# Altium PCB PCB1.PcbDoc (part 3 of 4)
Units mm, origin at the board's own origin, x right, y up, seen from the top; angles counter-clockwise.
Board outline 27.87 x 27.34 mm, 4 copper layers (Top Layer, Mid-Layer 1, Mid-Layer 2, Bottom Layer); 8 components, 11 nets, 32 pads, 618 vias.
Unrouted connection lines stored in the file: 1.
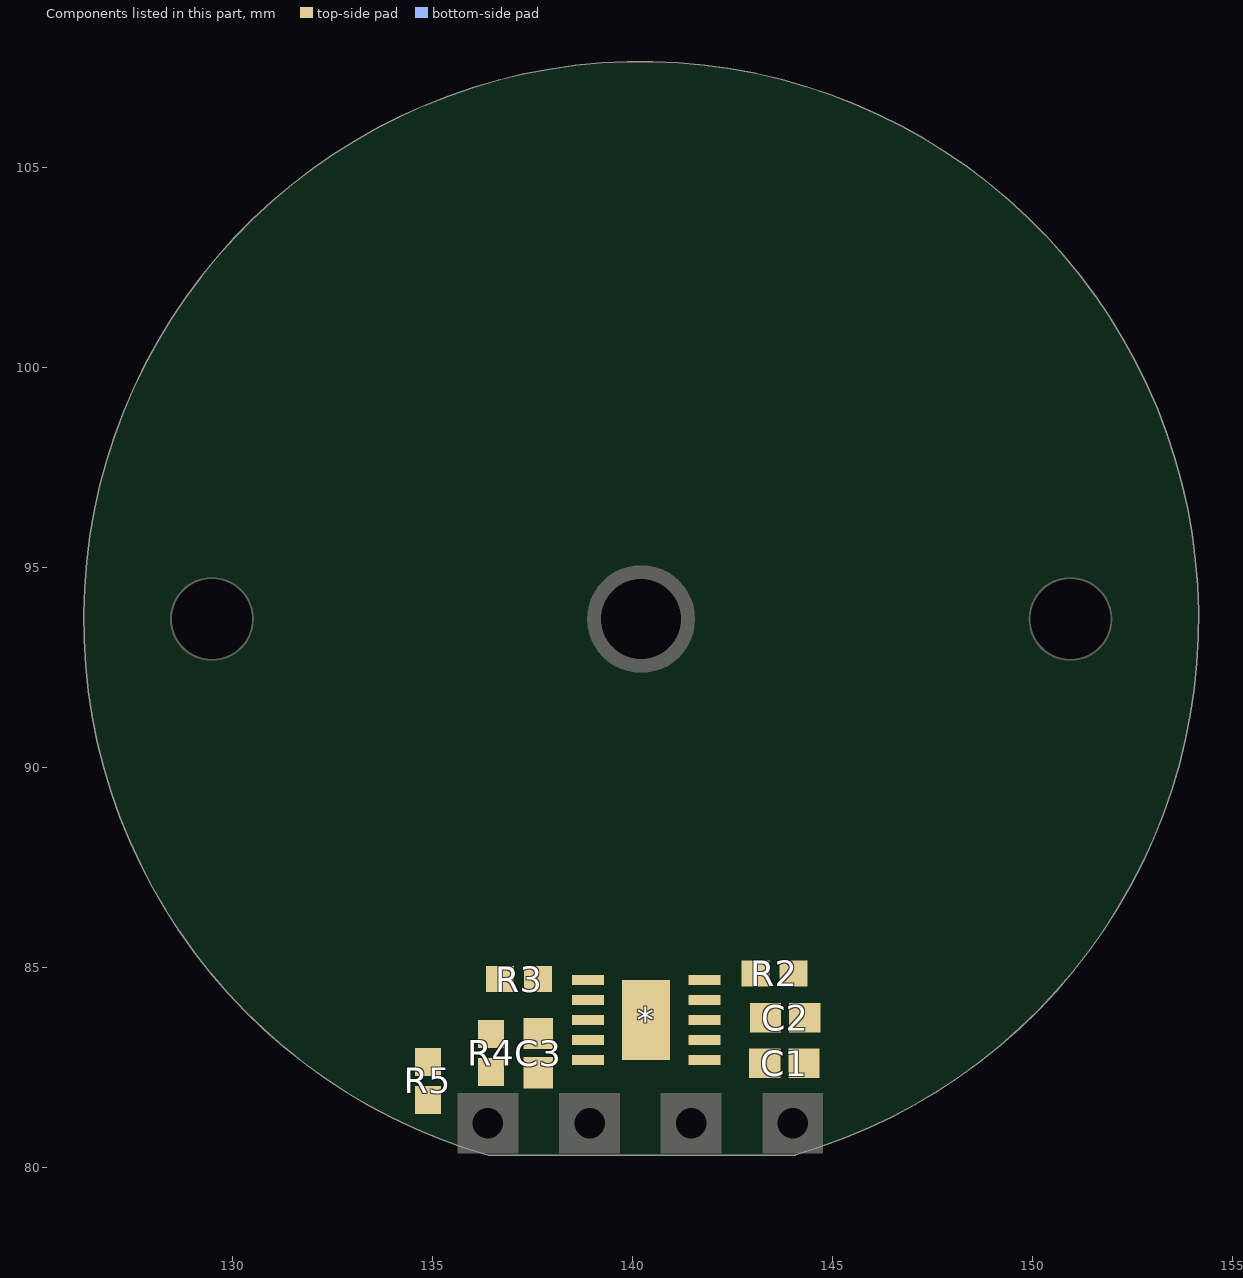
[diagram p5: the components of this part, seen from the top]

## Via types
v1: diameter 0.35, hole 0.3, Top Layer to Bottom Layer, 585 vias
v2: diameter 0.4, hole 0.2, Top Layer to Bottom Layer, tented both sides, 24 vias
v3: diameter 0.6, hole 0.3, Top Layer to Bottom Layer, tented both sides, 9 vias

## Nets (pads, with @x,y where several pads share a name; then routed paths per layer and width w, separated by ;. In a path a pad name is that pad's centre, name@x,y a point inside that pad or via, vN(x,y) a via of type N, cw(c..) or ccw(c..) an arc to the next point about the centre after c; other vN are vias at no path point) (continued)
copper on no net: (continued)
  Mid-Layer 2 w0.1: 133.392,90.821 133.405,90.802 ; 133.421,90.769 cw(c135.369,91.668) 133.405,90.802 ; v2(134.132,93.669) 133.84,93.174 ccw(c135.369,91.668) 133.405,90.802 ; 134.459,89.379 ccw(c136.017,90.546) 137.702,89.573 138.122,90.301 138.359,90.711 ccw(c136.718,91.615) 138.303,92.614 ; 134.459,89.379 133.405,90.802 ; v2(135.794,96.291) 135.898,96.967 ; 135.902,96.972 cw(c136.017,96.882) 136.143,96.955 136.781,95.849 cw(c136.718,95.813) 136.781,95.776 ; v2(136.311,91.464) 136.439,90.986 136.143,90.473 cw(c136.017,90.546) 135.902,90.456 135.894,90.467 135.056,91.521 cw(c135.369,91.668) 135.369,92.014 136.645,92.014 cw(c136.645,91.741) 136.877,91.885 ; 136.712,95.658 cw(c136.645,95.687) 136.709,95.652 ; 136.776,95.769 ccw(c136.718,95.813) 136.781,95.776 ; 136.89,91.861 ccw(c136.645,91.741) 136.877,91.885 ; 136.89,95.567 cw(c136.645,95.687) 136.877,95.543 ; 136.944,91.768 cw(c136.718,91.615) 136.959,91.744 ; 136.944,95.661 ccw(c136.718,95.813) 136.959,95.685 ; v2@137.003,88.354 cw(c136.483,87.262) 137.492,87.929 ccw(c139.56,88.5) 139.328,86.367 ; 137.067,91.954 ccw(c136.645,91.741) 137.05,91.986 ; 137.067,95.474 cw(c136.645,95.687) 137.05,95.442 ; 137.114,91.874 cw(c136.718,91.615) 137.132,91.843 ; 137.114,95.554 ccw(c136.718,95.813) 137.132,95.585 ; 137.244,92.049 ccw(c136.645,91.741) 137.224,92.085 ; 137.244,95.379 cw(c136.645,95.687) 137.224,95.343 ; 137.284,91.98 cw(c136.718,91.615) 137.305,91.944 ; 137.284,95.449 ccw(c136.718,95.813) 137.305,95.484 ; 137.398,92.184 ccw(c140.208,93.714) 137.437,92.114 ccw(c140.208,93.714) 137.478,92.045 ; 137.398,95.244 cw(c140.208,93.714) 137.437,95.314 cw(c140.208,93.714) 137.478,95.383 ; 137.42,92.144 ccw(c136.645,91.741) 136.645,92.614 135.362,92.614 ccw(c135.369,91.668) 134.523,91.245 135.394,90.135 ccw(c136.017,90.546) 136.663,90.173 137.301,91.279 ccw(c136.718,91.615) 137.305,91.944 ; 137.42,95.284 cw(c136.645,95.687) 136.645,94.814 135.362,94.814 cw(c135.369,95.76) 134.523,96.183 135.06,97.512 cw(c136.017,96.882) 137.009,97.455 137.647,96.349 cw(c136.718,95.813) 137.65,95.281 ; 137.454,92.084 cw(c136.718,91.615) 137.474,91.179 136.832,90.067 cw(c136.017,90.546) 135.227,90.025 134.344,91.155 cw(c135.369,91.668) 135.369,92.814 136.645,92.814 cw(c136.645,91.741) 137.572,92.282 ; 137.454,95.344 ccw(c136.718,95.813) 137.474,96.249 136.832,97.361 ccw(c136.017,96.882) 135.227,97.403 134.702,96.094 ccw(c135.369,95.76) 135.369,95.014 136.645,95.014 ccw(c136.645,95.687) 137.224,95.343 ; 138.343,92.547 cw(c140.208,93.714) 138.303,92.614 ; 138.762,94.549 138.303,94.814 ccw(c136.718,95.813) 138.359,96.717 138.122,97.127 137.702,97.855 ccw(c136.017,96.882) 134.459,98.049 133.765,96.449 ccw(c135.369,95.76) 135.369,94.014 136.688,94.014 ccw(c136.645,95.687) 138.13,94.914 ccw(c136.718,95.813) 138.188,96.612 137.529,97.755 ccw(c136.017,96.882) 134.618,97.927 133.958,96.391 ccw(c135.369,95.76) 135.369,94.214 136.693,94.214 ccw(c136.645,95.687) 137.911,94.933 ; 140.128,90.515 ccw(c140.208,93.714) 140.208,90.514 ccw(c140.208,93.714) 140.288,90.515 ; 140.128,96.913 cw(c140.208,93.714) 140.208,96.914 cw(c140.208,93.714) 140.288,96.913 ; 140.129,95.913 cw(c140.208,93.714) 140.208,95.914 ; 140.154,89.914 ccw(c140.135,89.642) 140.126,89.915 ; 140.154,97.514 cw(c140.135,97.786) 140.126,97.513 ; 140.162,90.114 ccw(c140.135,89.642) 140.126,90.115 ; 140.162,97.314 cw(c140.135,97.786) 140.126,97.313 ; 140.168,90.314 ccw(c140.135,89.642) 140.126,90.315 ; 140.168,97.114 cw(c140.135,97.786) 140.126,97.113 ; 140.174,90.514 ccw(c140.135,89.642) 139.379,90.079 138.738,88.967 ccw(c139.56,88.5) 139.504,87.556 140.9,87.756 ccw(c140.856,88.5) 141.502,88.873 140.864,89.979 ccw(c140.281,89.642) 140.29,90.315 ; 140.174,96.914 cw(c140.135,97.786) 139.379,97.349 138.738,98.461 cw(c139.56,98.928) 139.504,99.872 140.923,100.072 cw(c140.856,98.928) 141.848,98.355 141.21,97.249 cw(c140.281,97.786) 140.286,96.713 ; v2(140.208,89.214) 140.686,89.086 140.982,88.573 cw(c140.856,88.5) 140.876,88.356 140.863,88.354 139.531,88.156 cw(c139.56,88.5) 139.261,88.673 139.899,89.779 cw(c140.135,89.642) 140.126,89.915 ; v2(140.208,98.214) 139.73,98.342 139.434,98.855 cw(c139.56,98.928) 139.54,99.072 139.553,99.074 140.885,99.273 cw(c140.856,98.928) 141.155,98.755 140.517,97.649 cw(c140.281,97.786) 140.29,97.513 ; 140.242,90.514 cw(c140.281,89.642) 141.037,90.079 141.678,88.967 cw(c140.856,88.5) 140.912,87.556 139.493,87.356 cw(c139.56,88.5) 138.568,89.073 139.206,90.179 cw(c140.135,89.642) 140.13,90.715 ; 140.242,96.914 ccw(c140.281,97.786) 141.037,97.349 141.678,98.461 ccw(c140.856,98.928) 140.912,99.872 139.516,99.672 ccw(c139.56,98.928) 138.914,98.555 139.552,97.449 ccw(c140.135,97.786) 140.126,97.113 ; 140.248,90.314 cw(c140.281,89.642) 140.29,90.315 ; 140.248,97.114 ccw(c140.281,97.786) 140.29,97.113 ; 140.254,90.114 cw(c140.281,89.642) 140.29,90.115 ; 140.254,97.314 ccw(c140.281,97.786) 140.29,97.313 ; 140.262,89.914 cw(c140.281,89.642) 140.29,89.915 ; 140.262,97.514 ccw(c140.281,97.786) 140.29,97.513 ; 140.287,91.515 cw(c140.208,93.714) 140.208,91.514 ; 141.051,101.065 cw(c140.856,98.928) 141.088,101.061 ; 141.061,101.058 139.328,100.86 ; 141.111,101.064 141.088,101.061 ; 141.654,92.879 142.113,92.614 cw(c143.771,91.741) 143.733,93.614 145.047,93.614 cw(c145.047,91.668) 146.836,90.903 145.798,89.501 cw(c144.399,90.546) 142.887,89.673 142.228,90.816 cw(c143.698,91.615) 142.286,92.514 cw(c143.771,91.741) 143.728,93.414 145.047,93.414 cw(c145.047,91.668) 146.651,90.979 145.651,89.639 cw(c144.399,90.546) 143.061,89.773 142.399,90.92 cw(c143.698,91.615) 142.412,92.334 ; 142.073,94.881 cw(c140.208,93.714) 142.113,94.814 ; 142.938,92.045 ccw(c140.208,93.714) 142.979,92.114 ccw(c140.208,93.714) 143.018,92.184 ; 142.938,95.383 cw(c140.208,93.714) 142.979,95.314 cw(c140.208,93.714) 143.018,95.244 ; 142.962,92.084 ccw(c143.698,91.615) 142.942,91.179 143.584,90.067 ccw(c144.399,90.546) 145.189,90.025 146.072,91.155 ccw(c145.047,91.668) 145.047,92.814 143.771,92.814 ccw(c143.771,91.741) 142.844,92.282 ; 142.962,95.344 cw(c143.698,95.813) 142.942,96.249 143.584,97.361 cw(c144.399,96.882) 145.189,97.403 146.072,96.273 cw(c145.047,95.76) 145.047,94.614 143.771,94.614 cw(c143.771,95.687) 142.844,95.146 ; 142.996,92.144 cw(c143.771,91.741) 143.771,92.614 145.054,92.614 cw(c145.047,91.668) 145.893,91.245 145.022,90.135 cw(c144.399,90.546) 143.753,90.173 143.115,91.279 cw(c143.698,91.615) 143.111,91.944 ; 142.996,95.284 ccw(c143.771,95.687) 143.771,94.814 145.054,94.814 ccw(c145.047,95.76) 145.893,96.183 145.022,97.293 ccw(c144.399,96.882) 143.753,97.255 143.115,96.149 ccw(c143.698,95.813) 143.111,95.484 ; 143.132,91.98 ccw(c143.698,91.615) 143.111,91.944 ; 143.132,95.449 cw(c143.698,95.813) 143.111,95.484 ; 143.172,92.049 cw(c143.771,91.741) 143.192,92.085 ; 143.172,95.379 ccw(c143.771,95.687) 143.192,95.343 ; v2(143.207,98.999) 142.924,99.499 ccw(c140.856,98.928) 141.088,101.061 ; 143.302,91.874 ccw(c143.698,91.615) 143.284,91.843 ; 143.302,95.554 cw(c143.698,95.813) 143.284,95.585 ; 143.349,91.954 cw(c143.771,91.741) 143.366,91.986 ; 143.349,95.474 ccw(c143.771,95.687) 143.366,95.442 ; 143.472,91.768 ccw(c143.698,91.615) 143.457,91.744 ; 143.472,95.661 cw(c143.698,95.813) 143.457,95.685 ; 143.526,91.861 cw(c143.771,91.741) 143.539,91.885 ; 143.526,95.567 ccw(c143.771,95.687) 143.539,95.543 ; v2(144.105,91.464) 143.977,90.986 144.273,90.473 ccw(c144.399,90.546) 144.514,90.456 144.522,90.467 145.36,91.521 ccw(c145.047,91.668) 145.047,92.014 143.771,92.014 ccw(c143.771,91.741) 143.539,91.885 ; v2(144.105,95.964) 143.977,96.442 144.273,96.955 cw(c144.399,96.882) 144.514,96.972 144.522,96.961 145.36,95.907 cw(c145.047,95.76) 145.047,95.414 143.771,95.414 cw(c143.771,95.687) 143.539,95.543 ; 144.683,97.079 145.534,96.012 cw(c145.047,95.76) 145.004,95.214 143.771,95.214 cw(c143.771,95.687) 143.366,95.442 ; 144.683,97.079 ccw(c144.399,96.882) 144.1,97.055 143.462,95.949 ccw(c143.698,95.813) 143.457,95.685 ; v2(146.284,93.759) 146.576,94.254 ccw(c145.047,95.76) 147.011,96.626 ; 146.995,96.659 cw(c145.047,95.76) 147.011,96.626 ; 147.024,96.607 147.011,96.626 ; 136.709,95.651 cw(c136.645,95.687) 136.645,95.614 135.369,95.614 cw(c135.369,95.76) 135.233,95.814 135.238,95.827 135.733,97.079 cw(c136.017,96.882) 136.316,97.055 136.954,95.949 cw(c136.718,95.813) 136.959,95.685 ; 136.709,95.652 136.744,95.714 136.781,95.776 ; 136.877,91.885 ccw(c140.208,93.714) 136.917,91.814 ccw(c140.208,93.714) 136.959,91.744 ; 136.877,95.543 cw(c136.645,95.687) 136.645,95.414 135.369,95.414 cw(c135.369,95.76) 135.056,95.907 135.555,97.177 cw(c136.017,96.882) 136.511,97.117 137.128,96.049 cw(c136.718,95.813) 137.132,95.585 ; 136.877,95.543 cw(c140.208,93.714) 136.917,95.614 cw(c140.208,93.714) 136.959,95.685 ; 136.959,91.744 cw(c136.718,91.615) 136.954,91.479 136.316,90.373 cw(c136.017,90.546) 135.733,90.349 134.882,91.416 cw(c135.369,91.668) 135.412,92.214 136.645,92.214 cw(c136.645,91.741) 137.05,91.986 ; 137.05,91.986 ccw(c140.208,93.714) 137.09,91.914 ccw(c140.208,93.714) 137.132,91.843 ; 137.05,95.442 cw(c136.645,95.687) 136.645,95.214 135.412,95.214 cw(c135.369,95.76) 134.882,96.012 135.394,97.293 cw(c136.017,96.882) 136.663,97.255 137.301,96.149 cw(c136.718,95.813) 137.305,95.484 ; 137.05,95.442 cw(c140.208,93.714) 137.09,95.514 cw(c140.208,93.714) 137.132,95.585 ; 137.132,91.843 cw(c136.718,91.615) 137.128,91.379 136.511,90.311 cw(c136.017,90.546) 135.555,90.251 134.702,91.335 cw(c135.369,91.668) 135.369,92.414 136.645,92.414 cw(c136.645,91.741) 137.224,92.085 ; 137.224,92.085 ccw(c140.208,93.714) 137.264,92.014 ccw(c140.208,93.714) 137.305,91.944 ; 137.224,95.343 cw(c140.208,93.714) 137.264,95.414 cw(c140.208,93.714) 137.305,95.484 ; 137.572,92.282 cw(c136.645,91.741) 137.596,92.239 ; 137.572,92.282 ccw(c140.208,93.714) 137.596,92.239 ; 137.572,95.146 cw(c136.645,95.687) 136.645,94.614 135.369,94.614 cw(c135.369,95.76) 134.344,96.273 134.91,97.648 cw(c136.017,96.882) 137.182,97.555 137.846,96.405 cw(c136.718,95.813) 137.835,95.2 ccw(c140.208,93.714) 137.783,95.114 cw(c136.645,95.687) 136.697,94.414 135.369,94.414 cw(c135.369,95.76) 134.152,96.335 134.765,97.789 cw(c136.017,96.882) 137.355,97.655 138.017,96.508 cw(c136.718,95.813) 138.004,95.094 ccw(c140.208,93.714) 137.956,95.014 ; 137.572,95.146 cw(c140.208,93.714) 137.596,95.189 ; 137.572,95.146 ccw(c136.645,95.687) 137.596,95.189 ; 137.596,92.239 ccw(c140.208,93.714) 137.61,92.214 ccw(c140.208,93.714) 137.625,92.189 ; 137.596,95.189 cw(c140.208,93.714) 137.61,95.214 cw(c140.208,93.714) 137.625,95.239 ; 137.625,92.189 cw(c136.718,91.615) 137.65,92.147 ; 137.625,92.189 ccw(c140.208,93.714) 137.65,92.147 ; 137.625,95.239 cw(c140.208,93.714) 137.65,95.281 ; 137.625,95.239 ccw(c136.718,95.813) 137.65,95.281 ; 137.65,92.147 cw(c136.718,91.615) 137.647,91.079 137.009,89.973 cw(c136.017,90.546) 135.06,89.916 134.152,91.093 cw(c135.369,91.668) 135.369,93.014 136.697,93.014 cw(c136.645,91.741) 137.735,92.402 ccw(c140.208,93.714) 137.783,92.314 cw(c136.718,91.615) 137.846,91.023 137.182,89.873 cw(c136.017,90.546) 134.91,89.78 133.958,91.037 cw(c135.369,91.668) 135.369,93.214 136.693,93.214 cw(c136.645,91.741) 137.911,92.495 ccw(c140.208,93.714) 137.956,92.414 ; 137.911,94.933 cw(c140.208,93.714) 137.956,95.014 ; 137.911,94.933 ccw(c136.645,95.687) 137.956,95.014 ; 137.956,92.414 cw(c136.718,91.615) 138.004,92.334 ; 137.956,92.414 ccw(c140.208,93.714) 138.004,92.334 ; 138.004,92.334 cw(c136.718,91.615) 138.017,90.92 137.355,89.773 cw(c136.017,90.546) 134.765,89.639 133.765,90.979 cw(c135.369,91.668) 135.369,93.414 136.688,93.414 cw(c136.645,91.741) 138.13,92.514 cw(c136.718,91.615) 138.188,90.816 137.529,89.673 cw(c136.017,90.546) 134.618,89.501 133.58,90.903 cw(c135.369,91.668) 135.369,93.614 136.683,93.614 cw(c136.645,91.741) 138.303,92.614 ; 139.328,86.367 ccw(c139.56,88.5) 139.365,86.363 cw(c139.56,88.5) 139.328,86.367 ; 139.328,86.367 139.305,86.364 139.328,86.367 ; 139.328,86.367 141.088,86.568 ; 139.328,86.367 141.088,86.568 ; 139.328,86.568 cw(c139.56,88.5) 137.875,89.473 138.295,90.201 138.532,90.611 cw(c140.135,89.642) 140.208,91.514 ; 139.328,86.568 141.061,86.767 ; 139.328,86.568 141.061,86.767 ; 139.328,100.86 ccw(c139.56,98.928) 137.875,97.955 138.295,97.227 138.532,96.817 ccw(c140.135,97.786) 140.208,95.914 ; 139.328,100.86 141.088,101.061 ; 139.355,86.767 cw(c139.56,88.5) 138.048,89.373 138.708,90.516 cw(c140.135,89.642) 140.208,91.314 cw(c140.281,89.642) 141.708,90.516 142.368,89.373 cw(c140.856,88.5) 141.062,86.767 ; 139.355,86.767 141.015,86.963 ; 139.355,86.767 141.015,86.963 ; 140.115,96.312 cw(c140.135,97.786) 138.883,97.008 138.222,98.155 cw(c139.56,98.928) 139.401,100.465 141.061,100.662 cw(c140.856,98.928) 142.368,98.055 141.708,96.912 cw(c140.281,97.786) 140.208,96.114 cw(c140.135,97.786) 138.708,96.912 138.048,98.055 cw(c139.56,98.928) 139.354,100.662 141.088,100.86 cw(c140.856,98.928) 142.541,97.955 142.121,97.227 141.884,96.817 cw(c140.281,97.786) 140.208,95.914 ; 140.115,96.312 ccw(c140.135,97.786) 140.208,96.314 ; 140.115,96.312 cw(c140.208,93.714) 140.208,96.314 ; 140.126,89.915 ccw(c140.208,93.714) 140.208,89.914 ccw(c140.208,93.714) 140.29,89.915 ; 140.126,90.115 ccw(c140.135,89.642) 139.726,89.879 139.109,88.811 ccw(c139.56,88.5) 139.535,87.953 140.885,88.156 ccw(c140.856,88.5) 141.155,88.673 140.517,89.779 ccw(c140.281,89.642) 140.29,89.915 ; 140.126,90.115 ccw(c140.208,93.714) 140.208,90.114 ccw(c140.208,93.714) 140.29,90.115 ; 140.126,97.313 cw(c140.208,93.714) 140.208,97.314 cw(c140.208,93.714) 140.29,97.313 ; 140.126,97.313 cw(c140.135,97.786) 139.726,97.549 139.109,98.617 cw(c139.56,98.928) 139.535,99.475 140.9,99.672 cw(c140.856,98.928) 141.502,98.555 140.864,97.449 cw(c140.281,97.786) 140.29,97.113 ; 140.126,97.513 cw(c140.135,97.786) 139.899,97.649 139.261,98.755 cw(c139.56,98.928) 139.531,99.273 140.881,99.475 cw(c140.856,98.928) 141.307,98.617 140.69,97.549 cw(c140.281,97.786) 140.29,97.313 ; 140.126,97.513 cw(c140.208,93.714) 140.208,97.514 cw(c140.208,93.714) 140.29,97.513 ; 140.126,90.315 ccw(c140.135,89.642) 139.552,89.979 138.914,88.873 ccw(c139.56,88.5) 139.516,87.756 140.881,87.953 ccw(c140.856,88.5) 141.307,88.811 140.69,89.879 ccw(c140.281,89.642) 140.29,90.115 ; 140.126,90.315 ccw(c140.208,93.714) 140.208,90.314 ccw(c140.208,93.714) 140.29,90.315 ; 140.126,97.113 cw(c140.208,93.714) 140.208,97.114 cw(c140.208,93.714) 140.29,97.113 ; 140.13,90.715 ccw(c140.208,93.714) 140.179,90.714 ; 140.13,90.715 cw(c140.135,89.642) 140.179,90.714 ; 140.13,96.713 cw(c140.208,93.714) 140.179,96.714 ; 140.13,96.713 cw(c140.135,97.786) 139.206,97.249 138.568,98.355 cw(c139.56,98.928) 139.493,100.072 140.966,100.269 cw(c140.856,98.928) 142.021,98.255 141.357,97.105 cw(c140.281,97.786) 140.308,96.512 ccw(c140.208,93.714) 140.208,96.514 cw(c140.135,97.786) 139.059,97.105 138.395,98.255 cw(c139.56,98.928) 139.45,100.269 141.015,100.466 cw(c140.856,98.928) 142.194,98.155 141.533,97.008 cw(c140.281,97.786) 140.301,96.312 ccw(c140.208,93.714) 140.208,96.314 ; 140.13,96.713 ccw(c140.135,97.786) 140.179,96.714 ; 140.179,90.714 ccw(c140.208,93.714) 140.208,90.714 ccw(c140.208,93.714) 140.237,90.714 ; 140.179,96.714 cw(c140.208,93.714) 140.208,96.714 cw(c140.208,93.714) 140.237,96.714 ; 140.208,91.114 cw(c140.208,93.714) 140.115,91.116 ccw(c140.135,89.642) 138.883,90.42 138.222,89.273 ccw(c139.56,88.5) 139.401,86.963 140.966,87.159 ccw(c140.856,88.5) 142.021,89.173 141.357,90.323 ccw(c140.281,89.642) 140.208,90.914 cw(c140.208,93.714) 140.108,90.916 ccw(c140.135,89.642) 139.059,90.323 138.395,89.173 ccw(c139.56,88.5) 139.45,87.159 140.923,87.356 ccw(c140.856,88.5) 141.848,89.073 141.21,90.179 ccw(c140.281,89.642) 140.286,90.715 ; 140.208,91.114 ccw(c140.208,93.714) 140.301,91.116 ; 140.208,91.114 cw(c140.281,89.642) 140.301,91.116 ; 140.208,91.514 cw(c140.281,89.642) 141.884,90.611 142.121,90.201 142.541,89.473 cw(c140.856,88.5) 141.088,86.568 ; 140.237,90.714 ccw(c140.208,93.714) 140.286,90.715 ; 140.237,90.714 cw(c140.281,89.642) 140.286,90.715 ; 140.237,96.714 ccw(c140.281,97.786) 140.286,96.713 ; 140.237,96.714 cw(c140.208,93.714) 140.286,96.713 ; 140.301,91.116 cw(c140.281,89.642) 141.533,90.42 142.194,89.273 cw(c140.856,88.5) 141.015,86.963 ; 141.088,86.568 139.355,86.37 141.088,86.568 ; 142.113,94.814 cw(c143.698,95.813) 142.057,96.717 142.294,97.127 142.714,97.855 cw(c144.399,96.882) 145.957,98.049 147.011,96.626 ; 142.113,94.814 ccw(c143.771,95.687) 143.733,93.814 145.047,93.814 ccw(c145.047,95.76) 146.836,96.525 145.798,97.927 ccw(c144.399,96.882) 142.887,97.755 142.228,96.612 ccw(c143.698,95.813) 142.286,94.914 ccw(c143.771,95.687) 143.728,94.014 145.047,94.014 ccw(c145.047,95.76) 146.651,96.449 145.651,97.789 ccw(c144.399,96.882) 143.061,97.655 142.399,96.508 ccw(c143.698,95.813) 142.412,95.094 ; 142.412,92.334 cw(c143.698,91.615) 142.46,92.414 ; 142.412,92.334 ccw(c140.208,93.714) 142.46,92.414 ; 142.412,95.094 cw(c140.208,93.714) 142.46,95.014 ; 142.412,95.094 ccw(c143.698,95.813) 142.46,95.014 ; 142.46,92.414 ccw(c140.208,93.714) 142.505,92.495 cw(c143.771,91.741) 143.723,93.214 145.047,93.214 cw(c145.047,91.668) 146.458,91.037 145.506,89.78 cw(c144.399,90.546) 143.234,89.873 142.57,91.023 cw(c143.698,91.615) 142.633,92.314 ccw(c140.208,93.714) 142.681,92.402 cw(c143.771,91.741) 143.719,93.014 145.047,93.014 cw(c145.047,91.668) 146.264,91.093 145.356,89.916 cw(c144.399,90.546) 143.407,89.973 142.769,91.079 cw(c143.698,91.615) 142.766,92.147 ; 142.46,95.014 cw(c140.208,93.714) 142.505,94.933 ccw(c143.771,95.687) 143.723,94.214 145.047,94.214 ccw(c145.047,95.76) 146.458,96.391 145.506,97.648 ccw(c144.399,96.882) 143.234,97.555 142.57,96.405 ccw(c143.698,95.813) 142.633,95.114 cw(c140.208,93.714) 142.681,95.026 ccw(c143.771,95.687) 143.719,94.414 145.047,94.414 ccw(c145.047,95.76) 146.264,96.335 145.356,97.512 ccw(c144.399,96.882) 143.407,97.455 142.769,96.349 ccw(c143.698,95.813) 142.766,95.281 ; 142.766,92.147 ccw(c140.208,93.714) 142.791,92.189 ; 142.766,92.147 cw(c143.698,91.615) 142.791,92.189 ; 142.766,95.281 cw(c140.208,93.714) 142.791,95.239 ; 142.766,95.281 ccw(c143.698,95.813) 142.791,95.239 ; 142.791,92.189 ccw(c140.208,93.714) 142.806,92.214 ccw(c140.208,93.714) 142.82,92.239 ; 142.791,95.239 cw(c140.208,93.714) 142.806,95.214 cw(c140.208,93.714) 142.82,95.189 ; 142.82,92.239 cw(c143.771,91.741) 142.844,92.282 ; 142.82,92.239 ccw(c140.208,93.714) 142.844,92.282 ; 142.82,95.189 cw(c140.208,93.714) 142.844,95.146 ; 142.82,95.189 ccw(c143.771,95.687) 142.844,95.146 ; 143.111,91.944 ccw(c140.208,93.714) 143.152,92.014 ccw(c140.208,93.714) 143.192,92.085 ; 143.111,95.484 cw(c140.208,93.714) 143.152,95.414 cw(c140.208,93.714) 143.192,95.343 ; 143.192,92.085 cw(c143.771,91.741) 143.771,92.414 145.047,92.414 cw(c145.047,91.668) 145.714,91.335 144.861,90.251 cw(c144.399,90.546) 143.905,90.311 143.288,91.379 cw(c143.698,91.615) 143.284,91.843 ; 143.192,95.343 ccw(c143.771,95.687) 143.771,95.014 145.047,95.014 ccw(c145.047,95.76) 145.714,96.094 144.861,97.177 ccw(c144.399,96.882) 143.905,97.117 143.288,96.049 ccw(c143.698,95.813) 143.284,95.585 ; 143.284,91.843 ccw(c140.208,93.714) 143.326,91.914 ccw(c140.208,93.714) 143.366,91.986 ; 143.284,95.585 cw(c140.208,93.714) 143.326,95.514 cw(c140.208,93.714) 143.366,95.442 ; 143.366,91.986 cw(c143.771,91.741) 143.771,92.214 145.004,92.214 cw(c145.047,91.668) 145.534,91.416 144.683,90.349 cw(c144.399,90.546) 144.1,90.373 143.462,91.479 cw(c143.698,91.615) 143.457,91.744 ; 143.457,91.744 ccw(c140.208,93.714) 143.499,91.814 ccw(c140.208,93.714) 143.539,91.885 ; 143.457,95.685 cw(c140.208,93.714) 143.499,95.614 cw(c140.208,93.714) 143.539,95.543
  Mid-Layer 2 w0.3: 138.805,94.524 cw(c140.208,93.714) 141.611,92.904
  Bottom Layer w0.1: v2(134.132,93.669) 134.529,93.614 136.683,93.614 cw(c136.645,91.741) 138.303,92.614 ; 134.264,98.12 cw(c136.017,96.882) 134.285,98.149 ; 134.294,98.171 134.285,98.149 ; 134.882,91.416 135.394,90.135 ccw(c136.017,90.546) 136.663,90.173 137.301,91.279 ccw(c136.718,91.615) 137.305,91.944 ; 134.882,91.417 cw(c135.369,91.668) 135.412,92.214 136.645,92.214 cw(c136.645,91.741) 137.05,91.986 ; v2(135.769,91.18) 135.902,90.456 ccw(c136.017,90.546) 136.143,90.473 136.781,91.579 ccw(c136.718,91.615) 136.781,91.652 ; v2(136.311,95.964) 135.961,95.614 135.369,95.614 cw(c135.369,95.76) 135.233,95.814 135.238,95.827 135.733,97.079 cw(c136.017,96.882) 136.316,97.055 136.954,95.949 cw(c136.718,95.813) 136.959,95.685 ; 136.712,91.77 ccw(c136.645,91.741) 136.709,91.777 ; 136.776,91.659 cw(c136.718,91.615) 136.781,91.652 ; 136.89,91.861 ccw(c136.645,91.741) 136.877,91.885 ; 136.89,95.567 cw(c136.645,95.687) 136.877,95.543 ; 136.944,91.768 cw(c136.718,91.615) 136.959,91.744 ; 136.944,95.661 ccw(c136.718,95.813) 136.959,95.685 ; 137.067,91.954 ccw(c136.645,91.741) 137.05,91.986 ; 137.067,95.474 cw(c136.645,95.687) 137.05,95.442 ; 137.114,91.874 cw(c136.718,91.615) 137.132,91.843 ; 137.114,95.554 ccw(c136.718,95.813) 137.132,95.585 ; v2(137.131,98.954) 136.556,98.959 ccw(c136.017,96.882) 134.285,98.149 ; 137.244,92.049 ccw(c136.645,91.741) 137.224,92.085 ; 137.244,95.379 cw(c136.645,95.687) 137.224,95.343 ; 137.284,91.98 cw(c136.718,91.615) 137.305,91.944 ; 137.284,95.449 ccw(c136.718,95.813) 137.305,95.484 ; 137.398,92.184 ccw(c140.208,93.714) 137.437,92.114 ccw(c140.208,93.714) 137.478,92.045 ; 137.398,95.244 cw(c140.208,93.714) 137.437,95.314 cw(c140.208,93.714) 137.478,95.383 ; 137.42,92.144 ccw(c136.645,91.741) 136.645,92.614 135.362,92.614 ccw(c135.369,91.668) 134.523,91.245 135.06,89.916 ccw(c136.017,90.546) 137.009,89.973 137.647,91.079 ccw(c136.718,91.615) 137.65,92.147 ; 137.42,95.284 cw(c136.645,95.687) 136.645,94.814 135.362,94.814 cw(c135.369,95.76) 134.523,96.183 135.06,97.512 cw(c136.017,96.882) 137.009,97.455 137.647,96.349 cw(c136.718,95.813) 137.65,95.281 ; 137.454,92.084 cw(c136.718,91.615) 137.474,91.179 136.832,90.067 cw(c136.017,90.546) 135.227,90.025 134.702,91.335 cw(c135.369,91.668) 135.369,92.414 136.645,92.414 cw(c136.645,91.741) 137.224,92.085 ; 137.454,95.344 ccw(c136.718,95.813) 137.474,96.249 136.832,97.361 ccw(c136.017,96.882) 135.227,97.403 134.702,96.094 ccw(c135.369,95.76) 135.369,95.014 136.645,95.014 ccw(c136.645,95.687) 137.224,95.343 ; 138.265,92.683 ccw(c140.208,93.714) 138.303,92.614 ; 138.265,94.745 cw(c140.208,93.714) 138.303,94.814 ; 140.128,90.515 ccw(c140.208,93.714) 140.208,90.514 ccw(c140.208,93.714) 140.288,90.515 ; 140.128,96.913 cw(c140.208,93.714) 140.208,96.914 cw(c140.208,93.714) 140.288,96.913 ; 140.136,97.713 cw(c140.135,97.786) 140.072,97.749 139.434,98.855 cw(c139.56,98.928) 139.54,99.072 139.553,99.074 140.885,99.273 cw(c140.856,98.928) 141.155,98.755 140.517,97.649 cw(c140.281,97.786) 140.29,97.513 ; 140.144,97.714 cw(c140.135,97.786) 140.137,97.713 140.208,97.714 140.279,97.713 cw(c140.281,97.786) 140.272,97.714 ; 140.154,89.914 ccw(c140.135,89.642) 140.126,89.915 ; 140.154,97.514 cw(c140.135,97.786) 140.126,97.513 ; 140.162,90.114 ccw(c140.135,89.642) 140.126,90.115 ; 140.162,97.314 cw(c140.135,97.786) 140.126,97.313 ; 140.168,90.314 ccw(c140.135,89.642) 140.126,90.315 ; 140.168,97.114 cw(c140.135,97.786) 140.126,97.113 ; 140.174,90.514 ccw(c140.135,89.642) 139.379,90.079 138.738,88.967 ccw(c139.56,88.5) 139.504,87.556 140.923,87.356 ccw(c140.856,88.5) 141.848,89.073 141.21,90.179 ccw(c140.281,89.642) 140.286,90.715 ; 140.174,96.914 cw(c140.135,97.786) 139.379,97.349 138.738,98.461 cw(c139.56,98.928) 139.504,99.872 140.923,100.072 cw(c140.856,98.928) 141.848,98.355 141.21,97.249 cw(c140.281,97.786) 140.286,96.713 ; v2(140.208,89.214) 139.73,89.086 139.434,88.573 ccw(c139.56,88.5) 139.54,88.356 139.553,88.354 140.885,88.156 ccw(c140.856,88.5) 141.155,88.673 140.517,89.779 ccw(c140.281,89.642) 140.29,89.915 ; 140.208,92.044 140.208,91.514 cw(c140.281,89.642) 141.884,90.611 142.121,90.201 142.541,89.473 cw(c140.856,88.5) 141.088,86.568 ; 140.208,95.384 140.208,95.914 ccw(c140.281,97.786) 141.884,96.817 142.121,97.227 142.541,97.955 ccw(c140.856,98.928) 141.088,100.86 139.355,100.662 ccw(c139.56,98.928) 138.048,98.055 138.708,96.912 ccw(c140.135,97.786) 140.208,96.114 ccw(c140.281,97.786) 141.708,96.912 142.368,98.055 ccw(c140.856,98.928) 141.061,100.662 139.401,100.466 ccw(c139.56,98.928) 138.222,98.155 138.883,97.008 ccw(c140.135,97.786) 140.115,96.312 ; v2(140.233,98.825) 140.87,99.073 ; 140.242,90.514 cw(c140.281,89.642) 141.037,90.079 141.678,88.967 cw(c140.856,88.5) 140.912,87.556 139.516,87.756 cw(c139.56,88.5) 138.914,88.873 139.552,89.979 cw(c140.135,89.642) 140.126,90.315 ; 140.242,96.914 ccw(c140.281,97.786) 141.037,97.349 141.678,98.461 ccw(c140.856,98.928) 140.912,99.872 139.516,99.672 ccw(c139.56,98.928) 138.914,98.555 139.552,97.449 ccw(c140.135,97.786) 140.126,97.113 ; 140.248,90.314 cw(c140.281,89.642) 140.29,90.315 ; 140.248,97.114 ccw(c140.281,97.786) 140.29,97.113 ; 140.254,90.114 cw(c140.281,89.642) 140.29,90.115 ; 140.254,97.314 ccw(c140.281,97.786) 140.29,97.313 ; 140.262,89.914 cw(c140.281,89.642) 140.29,89.915 ; 140.262,97.514 ccw(c140.281,97.786) 140.29,97.513 ; 140.28,97.713 ccw(c140.281,97.786) 140.344,97.749 140.982,98.855 ccw(c140.856,98.928) 140.876,99.072 ; 142.151,92.683 cw(c140.208,93.714) 142.113,92.614 ; 142.151,94.745 ccw(c140.208,93.714) 142.113,94.814 ; 142.938,92.045 ccw(c140.208,93.714) 142.979,92.114 ccw(c140.208,93.714) 143.018,92.184 ; 142.938,95.383 cw(c140.208,93.714) 142.979,95.314 cw(c140.208,93.714) 143.018,95.244 ; 142.962,92.084 ccw(c143.698,91.615) 142.942,91.179 143.584,90.067 ccw(c144.399,90.546) 145.189,90.025 145.714,91.335 ccw(c145.047,91.668) 145.047,92.414 143.771,92.414 ccw(c143.771,91.741) 143.192,92.085 ; 142.962,95.344 cw(c143.698,95.813) 142.942,96.249 143.584,97.361 cw(c144.399,96.882) 145.189,97.403 145.714,96.094 cw(c145.047,95.76) 145.047,95.014 143.771,95.014 cw(c143.771,95.687) 143.192,95.343 ; 142.996,92.144 cw(c143.771,91.741) 143.771,92.614 145.054,92.614 cw(c145.047,91.668) 145.893,91.245 145.356,89.916 cw(c144.399,90.546) 143.407,89.973 142.769,91.079 cw(c143.698,91.615) 142.766,92.147 ; 142.996,95.284 ccw(c143.771,95.687) 143.771,94.814 145.054,94.814 ccw(c145.047,95.76) 145.893,96.183 145.356,97.512 ccw(c144.399,96.882) 143.407,97.455 142.769,96.349 ccw(c143.698,95.813) 142.766,95.281 ; 143.132,91.98 ccw(c143.698,91.615) 143.111,91.944 ; 143.132,95.449 cw(c143.698,95.813) 143.111,95.484 ; v2(143.169,88.569) 143.86,88.469 ccw(c144.399,90.546) 146.131,89.279 ; 143.172,92.049 cw(c143.771,91.741) 143.192,92.085 ; 143.172,95.379 ccw(c143.771,95.687) 143.192,95.343 ; 143.302,91.874 ccw(c143.698,91.615) 143.284,91.843 ; 143.302,95.554 cw(c143.698,95.813) 143.284,95.585 ; 143.349,91.954 cw(c143.771,91.741) 143.366,91.986 ; 143.349,95.474 ccw(c143.771,95.687) 143.366,95.442 ; 143.472,91.768 ccw(c143.698,91.615) 143.457,91.744 ; 143.526,91.861 cw(c143.771,91.741) 143.539,91.885 ; 143.526,95.567 ccw(c143.771,95.687) 143.539,95.543 ; 143.64,95.769 cw(c143.698,95.813) 143.635,95.776 ; 143.704,95.658 ccw(c143.771,95.687) 143.707,95.651 ; v2(144.105,91.464) 144.455,91.814 145.047,91.814 cw(c145.047,91.668) 145.183,91.614 145.178,91.601 144.683,90.349 cw(c144.399,90.546) 144.1,90.373 143.462,91.479 cw(c143.698,91.615) 143.457,91.744 ; 144.514,96.972 ccw(c144.399,96.882) 144.273,96.955 143.635,95.849 ccw(c143.698,95.813) 143.635,95.776 ; 144.522,96.961 v2(144.647,96.248) ; 145.534,91.416 145.022,90.135 cw(c144.399,90.546) 143.753,90.173 143.115,91.279 cw(c143.698,91.615) 143.111,91.944 ; 145.534,91.417 ccw(c145.047,91.668) 145.004,92.214 143.771,92.214 ccw(c143.771,91.741) 143.366,91.986 ; 146.122,89.257 146.131,89.279 ; 146.152,89.309 cw(c144.399,90.546) 146.131,89.279 ; v2(146.284,93.759) 145.957,93.814 143.733,93.814 cw(c143.771,95.687) 142.113,94.814 ; 134.285,98.149 133.58,96.525 ccw(c135.369,95.76) 135.369,93.814 136.683,93.814 ccw(c136.645,95.687) 138.303,94.814 ; 136.709,91.777 ccw(c136.645,91.741) 136.645,91.814 135.369,91.814 ccw(c135.369,91.668) 135.233,91.614 135.238,91.601 135.733,90.349 ccw(c136.017,90.546) 136.316,90.373 136.954,91.479 ccw(c136.718,91.615) 136.959,91.744 ; 136.709,91.777 136.744,91.714 136.781,91.652 ; 136.877,91.885 ccw(c136.645,91.741) 136.645,92.014 135.369,92.014 ccw(c135.369,91.668) 135.056,91.521 135.555,90.251 ccw(c136.017,90.546) 136.511,90.311 137.128,91.379 ccw(c136.718,91.615) 137.132,91.843 ; 136.877,91.885 ccw(c140.208,93.714) 136.917,91.814 ccw(c140.208,93.714) 136.959,91.744 ; 136.877,95.543 cw(c136.645,95.687) 136.645,95.414 135.369,95.414 cw(c135.369,95.76) 135.056,95.907 135.555,97.177 cw(c136.017,96.882) 136.511,97.117 137.128,96.049 cw(c136.718,95.813) 137.132,95.585 ; 136.877,95.543 cw(c140.208,93.714) 136.917,95.614 cw(c140.208,93.714) 136.959,95.685 ; 137.05,91.986 ccw(c140.208,93.714) 137.09,91.914 ccw(c140.208,93.714) 137.132,91.843 ; 137.05,95.442 cw(c136.645,95.687) 136.645,95.214 135.412,95.214 cw(c135.369,95.76) 134.882,96.012 135.394,97.293 cw(c136.017,96.882) 136.663,97.255 137.301,96.149 cw(c136.718,95.813) 137.305,95.484 ; 137.05,95.442 cw(c140.208,93.714) 137.09,95.514 cw(c140.208,93.714) 137.132,95.585 ; 137.224,92.085 ccw(c140.208,93.714) 137.264,92.014 ccw(c140.208,93.714) 137.305,91.944 ; 137.224,95.343 cw(c140.208,93.714) 137.264,95.414 cw(c140.208,93.714) 137.305,95.484 ; 137.572,92.282 ccw(c136.645,91.741) 136.645,92.814 135.369,92.814 ccw(c135.369,91.668) 134.344,91.155 134.91,89.78 ccw(c136.017,90.546) 137.182,89.873 137.846,91.023 ccw(c136.718,91.615) 137.835,92.228 cw(c140.208,93.714) 137.783,92.314 ccw(c136.645,91.741) 136.697,93.014 135.369,93.014 ccw(c135.369,91.668) 134.152,91.093 134.765,89.639 ccw(c136.017,90.546) 137.355,89.773 138.017,90.92 ccw(c136.718,91.615) 138.004,92.334 cw(c140.208,93.714) 137.956,92.414 ; 137.572,92.282 cw(c136.645,91.741) 137.596,92.239 ; 137.572,92.282 ccw(c140.208,93.714) 137.596,92.239 ; 137.572,95.146 cw(c136.645,95.687) 136.645,94.614 135.369,94.614 cw(c135.369,95.76) 134.344,96.273 134.91,97.648 cw(c136.017,96.882) 137.182,97.555 137.846,96.405 cw(c136.718,95.813) 137.835,95.2 ccw(c140.208,93.714) 137.783,95.114 cw(c136.645,95.687) 136.697,94.414 135.369,94.414 cw(c135.369,95.76) 134.152,96.335 134.765,97.789 cw(c136.017,96.882) 137.355,97.655 138.017,96.508 cw(c136.718,95.813) 138.004,95.094 ccw(c140.208,93.714) 137.956,95.014 ; 137.572,95.146 cw(c140.208,93.714) 137.596,95.189 ; 137.572,95.146 ccw(c136.645,95.687) 137.596,95.189 ; 137.596,92.239 ccw(c140.208,93.714) 137.61,92.214 ccw(c140.208,93.714) 137.625,92.189 ; 137.596,95.189 cw(c140.208,93.714) 137.61,95.214 cw(c140.208,93.714) 137.625,95.239 ; 137.625,92.189 cw(c136.718,91.615) 137.65,92.147 ; 137.625,92.189 ccw(c140.208,93.714) 137.65,92.147 ; 137.625,95.239 cw(c140.208,93.714) 137.65,95.281 ; 137.625,95.239 ccw(c136.718,95.813) 137.65,95.281 ; 137.911,92.495 ccw(c140.208,93.714) 137.956,92.414 ; 137.911,92.495 cw(c136.645,91.741) 137.956,92.414 ; 137.911,92.495 ccw(c136.645,91.741) 136.693,93.214 135.369,93.214 ccw(c135.369,91.668) 133.958,91.037 134.618,89.501 ccw(c136.017,90.546) 137.529,89.673 138.188,90.816 ccw(c136.718,91.615) 138.13,92.514 ccw(c136.645,91.741) 136.688,93.414 135.369,93.414 ccw(c135.369,91.668) 133.765,90.979 134.459,89.379 ccw(c136.017,90.546) 137.702,89.573 138.122,90.301 138.359,90.711 ccw(c136.718,91.615) 138.303,92.614 ; 137.911,94.933 cw(c136.645,95.687) 136.693,94.214 135.369,94.214 cw(c135.369,95.76) 133.958,96.391 134.618,97.927 cw(c136.017,96.882) 137.529,97.755 138.188,96.612 cw(c136.718,95.813) 138.13,94.914 cw(c136.645,95.687) 136.688,94.014 135.369,94.014 cw(c135.369,95.76) 133.765,96.449 134.459,98.049 cw(c136.017,96.882) 137.702,97.855 138.122,97.127 138.359,96.717 cw(c136.718,95.813) 138.303,94.814 ; 137.911,94.933 ccw(c136.645,95.687) 137.956,95.014 ; 137.911,94.933 cw(c140.208,93.714) 137.956,95.014 ; 139.354,86.767 cw(c139.56,88.5) 138.048,89.373 138.708,90.516 cw(c140.135,89.642) 140.208,91.314 cw(c140.281,89.642) 141.708,90.516 142.368,89.373 cw(c140.856,88.5) 141.061,86.767 ; 139.355,86.767 141.088,86.568 ; 139.355,86.767 141.088,86.568 ; 139.401,86.963 cw(c139.56,88.5) 138.222,89.273 138.883,90.42 cw(c140.135,89.642) 140.115,91.116 ; 139.401,86.963 141.061,86.767 ; 139.401,86.963 141.061,86.767 ; 140.115,91.116 ccw(c140.208,93.714) 140.208,91.114 ; 140.115,91.116 cw(c140.135,89.642) 140.208,91.114 ; 140.115,96.312 ccw(c140.135,97.786) 140.208,96.314 ; 140.115,96.312 cw(c140.208,93.714) 140.208,96.314 ; 140.126,89.915 ccw(c140.135,89.642) 139.899,89.779 139.261,88.673 ccw(c139.56,88.5) 139.531,88.156 140.881,87.953 ccw(c140.856,88.5) 141.307,88.811 140.69,89.879 ccw(c140.281,89.642) 140.29,90.115 ; 140.126,89.915 ccw(c140.208,93.714) 140.208,89.914 ccw(c140.208,93.714) 140.29,89.915 ; 140.126,90.115 ccw(c140.135,89.642) 139.726,89.879 139.109,88.811 ccw(c139.56,88.5) 139.535,87.953 140.9,87.756 ccw(c140.856,88.5) 141.502,88.873 140.864,89.979 ccw(c140.281,89.642) 140.29,90.315 ; 140.126,90.115 ccw(c140.208,93.714) 140.208,90.114 ccw(c140.208,93.714) 140.29,90.115 ; 140.126,97.313 cw(c140.208,93.714) 140.208,97.314 cw(c140.208,93.714) 140.29,97.313 ; 140.126,97.313 cw(c140.135,97.786) 139.726,97.549 139.109,98.617 cw(c139.56,98.928) 139.535,99.475 140.9,99.672 cw(c140.856,98.928) 141.502,98.555 140.864,97.449 cw(c140.281,97.786) 140.29,97.113 ; 140.126,97.513 cw(c140.135,97.786) 139.899,97.649 139.261,98.755 cw(c139.56,98.928) 139.531,99.273 140.881,99.475 cw(c140.856,98.928) 141.307,98.617 140.69,97.549 cw(c140.281,97.786) 140.29,97.313 ; 140.126,97.513 cw(c140.208,93.714) 140.208,97.514 cw(c140.208,93.714) 140.29,97.513 ; 140.126,90.315 ccw(c140.208,93.714) 140.208,90.314 ccw(c140.208,93.714) 140.29,90.315 ; 140.126,97.113 cw(c140.208,93.714) 140.208,97.114 cw(c140.208,93.714) 140.29,97.113 ; 140.13,90.715 ccw(c140.135,89.642) 139.206,90.179 138.568,89.073 ccw(c139.56,88.5) 139.493,87.356 140.966,87.159 ccw(c140.856,88.5) 142.021,89.173 141.357,90.323 ccw(c140.281,89.642) 140.308,90.916 cw(c140.208,93.714) 140.208,90.914 ccw(c140.135,89.642) 139.059,90.323 138.395,89.173 ccw(c139.56,88.5) 139.45,87.159 141.015,86.963 ccw(c140.856,88.5) 142.194,89.273 141.533,90.42 ccw(c140.281,89.642) 140.301,91.116 cw(c140.208,93.714) 140.208,91.114 ; 140.13,90.715 ccw(c140.208,93.714) 140.179,90.714 ; 140.13,90.715 cw(c140.135,89.642) 140.179,90.714 ; 140.13,96.713 cw(c140.208,93.714) 140.179,96.714 ; 140.13,96.713 cw(c140.135,97.786) 139.206,97.249 138.568,98.355 cw(c139.56,98.928) 139.493,100.072 140.966,100.269 cw(c140.856,98.928) 142.021,98.255 141.357,97.105 cw(c140.281,97.786) 140.308,96.512 ccw(c140.208,93.714) 140.208,96.514 cw(c140.135,97.786) 139.059,97.105 138.395,98.255 cw(c139.56,98.928) 139.45,100.269 141.015,100.466 cw(c140.856,98.928) 142.194,98.155 141.533,97.008 cw(c140.281,97.786) 140.301,96.312 ccw(c140.208,93.714) 140.208,96.314 ; 140.13,96.713 ccw(c140.135,97.786) 140.179,96.714 ; 140.179,90.714 ccw(c140.208,93.714) 140.208,90.714 ccw(c140.208,93.714) 140.237,90.714 ; 140.179,96.714 cw(c140.208,93.714) 140.208,96.714 cw(c140.208,93.714) 140.237,96.714 ; 140.237,90.714 ccw(c140.208,93.714) 140.286,90.715 ; 140.237,90.714 cw(c140.281,89.642) 140.286,90.715 ; 140.237,96.714 ccw(c140.281,97.786) 140.286,96.713 ; 140.237,96.714 cw(c140.208,93.714) 140.286,96.713 ; 142.113,92.614 ccw(c143.698,91.615) 142.057,90.711 142.294,90.301 142.714,89.573 ccw(c144.399,90.546) 145.957,89.379 146.651,90.979 ccw(c145.047,91.668) 145.047,93.414 143.728,93.414 ccw(c143.771,91.741) 142.286,92.514 ccw(c143.698,91.615) 142.228,90.816 142.887,89.673 ccw(c144.399,90.546) 145.798,89.501 146.458,91.037 ccw(c145.047,91.668) 145.047,93.214 143.723,93.214 ccw(c143.771,91.741) 142.505,92.495 ; 142.113,92.614 cw(c143.771,91.741) 143.733,93.614 145.047,93.614 cw(c145.047,91.668) 146.836,90.903 146.131,89.279 ; 142.113,94.814 cw(c143.698,95.813) 142.057,96.717 142.294,97.127 142.714,97.855 cw(c144.399,96.882) 145.957,98.049 146.651,96.449 cw(c145.047,95.76) 145.047,94.014 143.728,94.014 cw(c143.771,95.687) 142.286,94.914 cw(c143.698,95.813) 142.228,96.612 142.887,97.755 cw(c144.399,96.882) 145.798,97.927 146.458,96.391 cw(c145.047,95.76) 145.047,94.214 143.723,94.214 cw(c143.771,95.687) 142.505,94.933 ; 142.46,92.414 cw(c140.208,93.714) 142.412,92.334 ccw(c143.698,91.615) 142.399,90.92 143.061,89.773 ccw(c144.399,90.546) 145.651,89.639 146.264,91.093 ccw(c145.047,91.668) 145.047,93.014 143.719,93.014 ccw(c143.771,91.741) 142.633,92.314 cw(c140.208,93.714) 142.581,92.228 ccw(c143.698,91.615) 142.57,91.023 143.234,89.873 ccw(c144.399,90.546) 145.506,89.78 146.072,91.155 ccw(c145.047,91.668) 145.047,92.814 143.771,92.814 ccw(c143.771,91.741) 142.844,92.282 ; 142.46,92.414 ccw(c140.208,93.714) 142.505,92.495 ; 142.46,92.414 cw(c143.771,91.741) 142.505,92.495 ; 142.46,95.014 ccw(c140.208,93.714) 142.412,95.094 cw(c143.698,95.813) 142.399,96.508 143.061,97.655 cw(c144.399,96.882) 145.651,97.789 146.264,96.335 cw(c145.047,95.76) 145.047,94.414 143.719,94.414 cw(c143.771,95.687) 142.633,95.114 ccw(c140.208,93.714) 142.581,95.2 cw(c143.698,95.813) 142.57,96.405 143.234,97.555 cw(c144.399,96.882) 145.506,97.648 146.072,96.273 cw(c145.047,95.76) 145.047,94.614 143.771,94.614 cw(c143.771,95.687) 142.844,95.146 ; 142.46,95.014 ccw(c143.771,95.687) 142.505,94.933 ; 142.46,95.014 cw(c140.208,93.714) 142.505,94.933 ; 142.766,92.147 cw(c143.698,91.615) 142.791,92.189 ; 142.766,92.147 ccw(c140.208,93.714) 142.791,92.189 ; 142.766,95.281 cw(c140.208,93.714) 142.791,95.239 ; 142.766,95.281 ccw(c143.698,95.813) 142.791,95.239 ; 142.791,92.189 ccw(c140.208,93.714) 142.806,92.214 ccw(c140.208,93.714) 142.82,92.239 ; 142.791,95.239 cw(c140.208,93.714) 142.806,95.214 cw(c140.208,93.714) 142.82,95.189 ; 142.82,92.239 cw(c143.771,91.741) 142.844,92.282 ; 142.82,92.239 ccw(c140.208,93.714) 142.844,92.282 ; 142.82,95.189 cw(c140.208,93.714) 142.844,95.146 ; 142.82,95.189 ccw(c143.771,95.687) 142.844,95.146 ; 143.111,91.944 ccw(c140.208,93.714) 143.152,92.014 ccw(c140.208,93.714) 143.192,92.085 ; 143.111,95.484 cw(c140.208,93.714) 143.152,95.414 cw(c140.208,93.714) 143.192,95.343 ; 143.111,95.484 cw(c143.698,95.813) 143.115,96.149 143.753,97.255 cw(c144.399,96.882) 145.022,97.293 145.534,96.012 cw(c145.047,95.76) 145.004,95.214 143.771,95.214 cw(c143.771,95.687) 143.366,95.442 ; 143.284,91.843 ccw(c143.698,91.615) 143.288,91.379 143.905,90.311 ccw(c144.399,90.546) 144.861,90.251 145.36,91.521 ccw(c145.047,91.668) 145.047,92.014 143.771,92.014 ccw(c143.771,91.741) 143.539,91.885 ; 143.284,91.843 ccw(c140.208,93.714) 143.326,91.914 ccw(c140.208,93.714) 143.366,91.986 ; 143.284,95.585 cw(c143.698,95.813) 143.288,96.049 143.905,97.117 cw(c144.399,96.882) 144.861,97.177 145.36,95.907 cw(c145.047,95.76) 145.047,95.414 143.771,95.414 cw(c143.771,95.687) 143.539,95.543 ; 143.284,95.585 cw(c140.208,93.714) 143.326,95.514 cw(c140.208,93.714) 143.366,95.442 ; 143.457,91.744 ccw(c140.208,93.714) 143.499,91.814 ccw(c140.208,93.714) 143.539,91.885 ; 143.457,95.685 cw(c140.208,93.714) 143.499,95.614 cw(c140.208,93.714) 143.539,95.543 ; 143.457,95.685 cw(c143.698,95.813) 143.462,95.949 ; 143.457,95.685 cw(c143.698,95.813) 143.462,95.949 ; 143.457,95.685 ccw(c143.698,95.813) 143.472,95.661 cw(c143.698,95.813) 143.457,95.685 ; 143.462,95.949 144.1,97.055 cw(c144.399,96.882) 144.683,97.079 145.178,95.827 145.183,95.814 cw(c145.047,95.76) 145.047,95.614 143.771,95.614 cw(c143.771,95.687) 143.707,95.651 ; 143.635,95.776 143.672,95.714 143.707,95.651
  Bottom Layer w0.3: 140.208,92.094 ccw(c140.208,93.714) 140.208,95.334
  other v1: 133.658,82.369 146.758,82.369 133.958,82.889 146.458,82.889 132.694,82.983 147.722,82.983 134.258,83.408 146.158,83.408 133.038,83.475 147.378,83.475 131.787,83.679 148.629,83.679 134.558,83.928 145.858,83.928 133.382,83.966 147.034,83.966 132.173,84.139 148.243,84.139 130.945,84.451 133.727,84.458 134.858,84.448 145.558,84.448 146.689,84.458 149.471,84.451 132.559,84.598 147.857,84.598 131.369,84.875 149.047,84.875 134.071,84.949 146.345,84.949 135.158,84.967 145.258,84.967 132.944,85.058 147.472,85.058 130.173,85.294 131.793,85.299 148.623,85.299 150.243,85.294 134.415,85.441 146.001,85.441 135.458,85.487 144.958,85.487 133.33,85.517 147.086,85.517 130.632,85.679 149.784,85.679 132.218,85.724 148.198,85.724 134.759,85.932 145.657,85.932 133.716,85.977 146.7,85.977 135.758,86.006 144.658,86.006 131.092,86.065 149.324,86.065 132.642,86.148 147.774,86.148 129.477,86.2 150.939,86.2 134.102,86.437 135.103,86.424 145.313,86.424 146.314,86.437 131.552,86.451 148.864,86.451 129.969,86.544 136.058,86.526 144.358,86.526 150.447,86.544 133.066,86.572 147.35,86.572 132.011,86.836 148.405,86.836 130.46,86.889 134.487,86.896 145.929,86.896 149.956,86.889 135.447,86.915 144.969,86.915 133.49,86.997 146.926,86.997 136.35,87.015 144.081,87.023 128.863,87.164 151.553,87.164 130.952,87.233 132.471,87.222 147.945,87.222 149.464,87.233 134.873,87.356 145.543,87.356 135.781,87.376 144.649,87.386 133.915,87.421 146.501,87.421 129.383,87.464 151.033,87.464 131.443,87.577 148.973,87.577 132.931,87.608 147.485,87.608 129.902,87.764 150.514,87.764 135.246,87.786 145.184,87.798 134.339,87.845 146.077,87.845 131.935,87.921 148.481,87.921 133.39,87.993 147.026,87.993 130.422,88.064 149.994,88.064 128.335,88.178 152.081,88.178 134.748,88.241 132.426,88.265 145.681,88.254 147.99,88.265 130.942,88.364 133.85,88.379 146.566,88.379 149.474,88.364 128.879,88.431 151.537,88.431 132.918,88.609 147.498,88.609 131.461,88.664 148.955,88.664 129.423,88.685 150.993,88.685 134.292,88.738 146.136,88.752 129.967,88.938 133.409,88.953 147.007,88.953 150.449,88.938 131.981,88.964 148.435,88.964 130.511,89.192 149.905,89.192 127.898,89.234 152.518,89.234 132.5,89.264 147.916,89.264 133.88,89.273 146.546,89.287 128.462,89.439 131.054,89.446 149.362,89.446 151.954,89.439 133.02,89.564 147.396,89.564 129.026,89.644 151.39,89.644 131.598,89.699 148.818,89.699 129.589,89.849 133.517,89.841 150.827,89.849 146.908,89.856 132.142,89.953 148.274,89.953 130.153,90.054 150.263,90.054 132.686,90.206 147.73,90.206 130.717,90.26 149.699,90.26 127.554,90.324 152.862,90.324 133.205,90.439 147.218,90.455 128.134,90.479 131.281,90.465 149.135,90.465 152.282,90.479 128.713,90.634 151.703,90.634 131.845,90.67 148.571,90.67 129.293,90.789 151.123,90.789 132.409,90.875 148.007,90.875 150.543,90.945 129.873,90.945 132.946,91.062 147.476,91.078 130.452,91.1 149.964,91.1 131.032,91.255 149.384,91.255 131.611,91.411 148.805,91.411 127.307,91.439 153.109,91.439 127.898,91.543 152.518,91.543 132.191,91.566 148.225,91.566 128.489,91.648 151.927,91.648 132.743,91.705 147.678,91.722 129.08,91.752 151.336,91.752 129.671,91.856 150.745,91.856 130.261,91.96 150.155,91.96 130.852,92.064 149.564,92.064 131.443,92.169 148.973,92.169 132.034,92.273 148.382,92.273 132.596,92.363 147.823,92.38 127.158,92.572 153.258,92.572 127.756,92.625 152.66,92.625 131.342,92.938 149.074,92.938 131.94,92.991 148.476,92.991 132.507,93.031 147.91,93.049 132.477,93.705 127.108,93.714 127.708,93.714 131.308,93.714 131.908,93.714 147.939,93.723 148.508,93.714 149.108,93.714 152.708,93.714 153.308,93.714 132.506,94.379 147.909,94.397 131.94,94.437 148.476,94.437 131.342,94.49 149.074,94.49 127.756,94.803 152.66,94.804 127.158,94.856 153.258,94.856 132.593,95.048 147.82,95.065 132.034,95.155 148.382,95.155 131.443,95.26 148.973,95.26 130.852,95.364 149.564,95.364 130.261,95.468 150.155,95.468 129.671,95.572 150.745,95.572 129.08,95.676 151.336,95.676 132.738,95.706 147.673,95.724 128.489,95.78 151.927,95.78 132.191,95.862 148.225,95.862 127.898,95.885 152.518,95.885 127.307,95.989 153.109,95.989 131.611,96.018 148.805,96.018 131.032,96.173 149.384,96.173 130.452,96.328 149.964,96.328 132.94,96.35 147.47,96.367 129.873,96.483 150.543,96.483 132.409,96.553 148.007,96.553 129.293,96.639 151.123,96.639 131.845,96.758 148.571,96.758 128.713,96.794 151.703,96.794 128.134,96.949 131.281,96.963 149.135,96.963 152.282,96.949 133.198,96.973 147.211,96.989 127.554,97.105 152.862,97.105 130.717,97.168 149.699,97.168 132.686,97.222 147.73,97.222 130.153,97.374 150.263,97.374 132.142,97.475 148.274,97.475 133.508,97.572 129.589,97.579 146.899,97.587 150.827,97.579 131.598,97.729 148.818,97.729 129.026,97.784 151.39,97.784 133.02,97.864 147.396,97.864 128.462,97.989 131.054,97.983 149.362,97.983 151.954,97.989 133.87,98.141 146.536,98.156 132.5,98.164 147.916,98.164 127.898,98.195 152.518,98.195 130.511,98.236 149.905,98.236 131.981,98.464 133.409,98.475 147.007,98.475 148.435,98.464 129.967,98.49 150.449,98.49 134.28,98.676 146.124,98.69 129.423,98.743 131.461,98.764 148.955,98.764 150.993,98.743 132.918,98.819 147.498,98.819 128.879,98.997 151.537,98.997 130.942,99.064 133.85,99.049 146.566,99.049 149.474,99.064 132.426,99.163 134.735,99.174 147.99,99.163 145.668,99.187 128.335,99.25 152.081,99.25 130.422,99.364 149.994,99.364 133.39,99.435 147.026,99.435 131.935,99.507 148.481,99.507 134.339,99.583 146.077,99.583 135.232,99.63 145.17,99.642 129.902,99.664 150.514,99.664 132.931,99.821 147.485,99.821 131.443,99.851 148.973,99.851 129.383,99.964 151.033,99.964 133.915,100.007 146.501,100.007 135.767,100.042 144.635,100.052 134.873,100.072 145.543,100.072 130.952,100.195 132.471,100.206 147.945,100.206 149.464,100.195 128.863,100.264 151.553,100.264 136.335,100.405 144.066,100.414 133.49,100.432 146.926,100.432 135.447,100.513 144.969,100.513 130.46,100.54 134.487,100.532 145.929,100.532 149.956,100.54 132.011,100.592 148.405,100.592 136.933,100.717 143.467,100.724 133.066,100.856 147.35,100.856 129.969,100.884 150.447,100.884 136.058,100.902 144.358,100.902 131.552,100.978 137.556,100.976 148.864,100.978 134.102,100.991 142.844,100.982 146.314,100.991 135.103,101.005 145.313,101.005 138.199,101.179 142.2,101.184 129.477,101.228 150.939,101.228 136.7,101.236 143.716,101.236 132.642,101.28 147.774,101.28 138.857,101.326 141.542,101.329 131.092,101.363 149.324,101.363 135.758,101.422 139.525,101.415 140.873,101.416 144.658,101.422 133.716,101.451 140.199,101.445 140.199,101.445 146.7,101.451 134.759,101.496 145.657,101.496 137.369,101.514 143.047,101.514 132.218,101.704 148.198,101.704 138.06,101.731 142.356,101.731 130.632,101.749 149.784,101.749 136.447,101.78 143.969,101.78 138.767,101.888 141.649,101.888 133.33,101.911 147.086,101.911 135.458,101.941 144.958,101.941 134.415,101.987 139.485,101.982 140.931,101.982 146.001,101.987 140.208,102.014 140.208,102.014 137.164,102.077 143.252,102.077 130.173,102.135 131.793,102.129 148.623,102.129 150.243,102.135 137.905,102.311 142.511,102.311 136.193,102.324 144.223,102.324 132.944,102.37 147.472,102.37 135.158,102.461 145.258,102.461 134.071,102.479 138.663,102.479 141.753,102.479 146.345,102.479 131.369,102.553 149.047,102.553 139.432,102.58 140.984,102.58 140.208,102.614 140.208,102.614 136.959,102.641 143.457,102.641 132.559,102.83 147.857,102.83 135.94,102.868 144.476,102.868 137.749,102.89 142.667,102.89 130.945,102.977 133.727,102.97 134.858,102.981 145.558,102.981 146.689,102.97 149.471,102.977 138.558,103.07 141.858,103.07 139.38,103.178 141.036,103.178 136.754,103.205 143.662,103.205 140.208,103.214 140.208,103.214 132.173,103.29 148.243,103.29 135.686,103.412 144.73,103.412 133.382,103.462 147.034,103.462 137.594,103.47 142.822,103.47 134.558,103.5 145.858,103.5 138.454,103.661 141.962,103.661 131.787,103.749 136.548,103.769 143.868,103.769 148.629,103.749 139.328,103.776 141.088,103.776 140.208,103.814 140.208,103.814 133.038,103.953 135.432,103.955 144.984,103.955 147.378,103.953 134.258,104.02 146.158,104.02 137.439,104.049 142.977,104.049 138.35,104.252 142.066,104.252 136.343,104.333 144.073,104.333 139.275,104.373 141.141,104.373 140.208,104.414 132.694,104.445 147.722,104.445 135.179,104.499 145.237,104.499 133.958,104.539 146.458,104.539 137.283,104.629 143.133,104.629 138.246,104.842 142.17,104.842 136.138,104.896 144.278,104.896 139.223,104.971 141.193,104.971 140.208,105.014 133.658,105.059 134.925,105.043 145.491,105.043 146.758,105.059 137.128,105.209 143.288,105.209 138.142,105.433 142.274,105.433 135.933,105.46 144.483,105.46 139.171,105.569 141.245,105.569 134.672,105.587 145.744,105.587 140.208,105.614 136.973,105.788 143.443,105.788 135.728,106.024 138.037,106.024 142.379,106.024 144.688,106.024 139.119,106.167 141.297,106.167 140.208,106.214 136.817,106.368 143.599,106.368 137.933,106.615 142.483,106.615 139.066,106.764 141.35,106.764 140.208,106.814
  other v2: 141.444,91.614 139.026,91.723 142.618,93.687 137.826,93.75 139.046,95.653 141.444,95.863

## Polygon pours and split planes (outlines as drawn)
no net on Bottom Solder "NONET_L-01_P-001" (solid): 132.743,92.73 126.39,91.892 ccw(c140.347,93.809) 133.487,81.504 136.597,87.086 cw(c140.337,93.779)